# Altium PCB PCB1.PcbDoc (part 1 of 2)
Units mil, origin at the board's own origin, x right, y up, seen from the top; angles counter-clockwise.
Board outline 3937.01 x 3582.68 mil, 2 copper layers (Top Layer, Bottom Layer); 143 components, 102 nets, 475 pads, 464 vias.
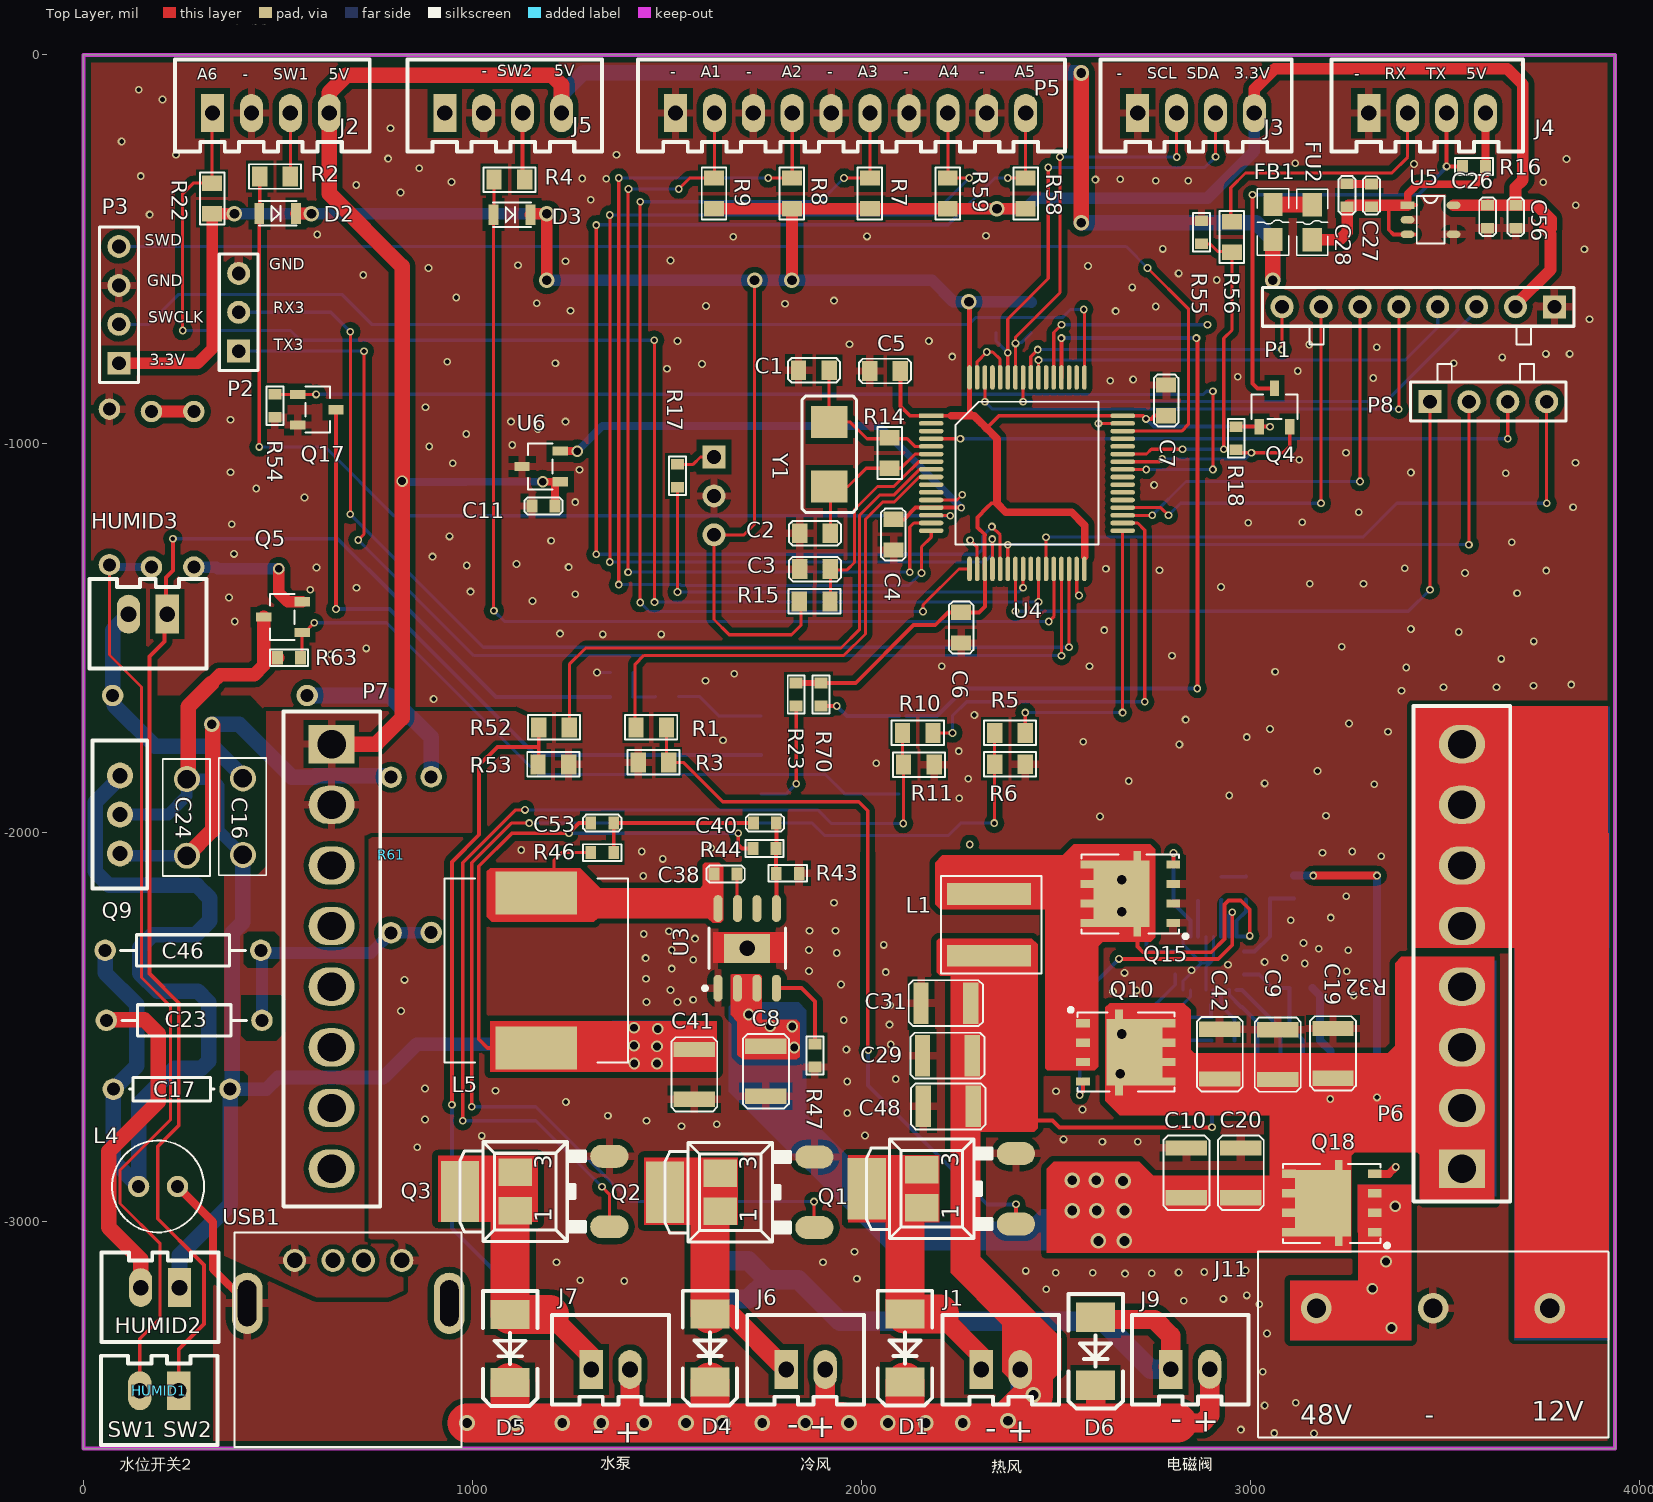
[diagram p0: Top Layer view]
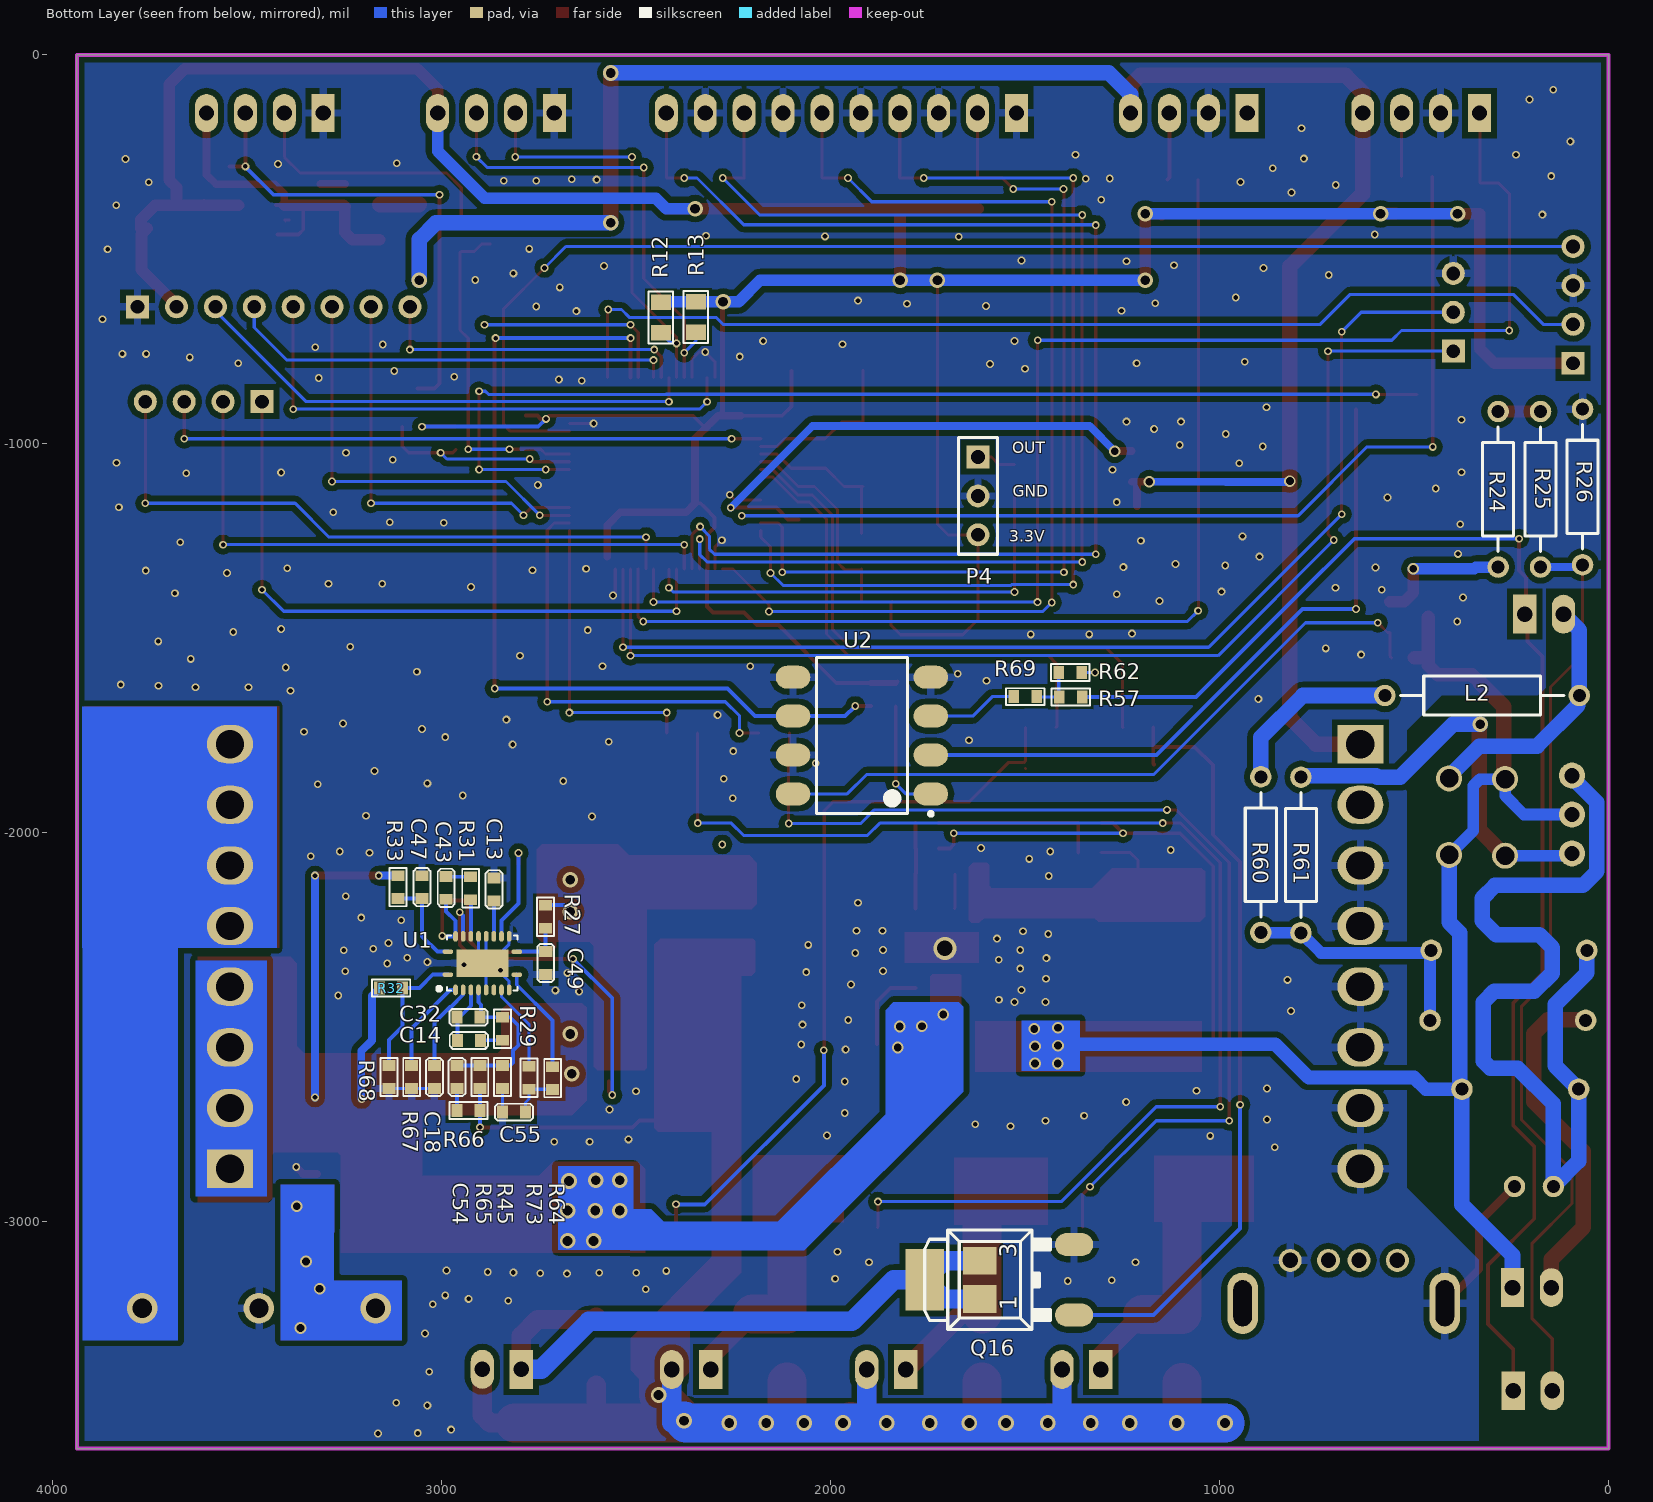
[diagram p1: Bottom Layer view, seen from below]

## Layer stack, top to bottom
Top Layer: signal copper 1.4
Dielectric: dielectric 12.6, FR-4, Dk 4.8
Bottom Layer: signal copper 1.4

## Board outline
0,-3583.01 3937.01,-3583.01 3937.01,-0.33 0,-0.33

## Design rules (kind name [scope] priority, off if disabled: settings)
Clearance Clearance_2 [InNet('+5V')  And InPolygon] p1: gap=12
Clearance Clearance_1 [InPoly And InNet(GND)] p2: gap=15
Clearance [All] p3: gap=5
MinimumSolderMaskSliver [All] p1: minsoldermaskwidth=1
PolygonConnect PolygonConnect_1 [IsVia] p1: connectstyle=Direct reliefconductorwidth=10 reliefentries=4 polygonreliefangle="90 Angle"
PolygonConnect [All] p2: connectstyle=Relief reliefconductorwidth=20 reliefentries=4 polygonreliefangle="90 Angle"
RoutingVias [All] p1: holewidth=28 width=50 viastyle="Through Hole" minholewidth=28 minwidth=50 maxholewidth=28 maxwidth=50
SilkToSilkClearance [All] p1: silktosilkclearance=1
SilkscreenOverComponentPads [All] p1: minsilkscreentomaskgap=1
SolderMaskExpansion [All] p1: expansion=4
Width [All] p1: maxlimit=200 minlimit=6 preferedwidth=10
25 further rules are at their usual default settings.

## Classes and differential pairs
component class Humidifier: C8 C10 C16 C17 C20 C23 C24 C38 C40 C41 C46 C53 HUMID1 HUMID2 HUMID3 L2 L4 L5 Q5 Q9 Q17 Q18 R23 R24 R25 R26 R43 R44 R46 R47 R54 R57 R60 R61 R62 R63 R69 R70 U2 U3
component class cpu: C1 C2 C3 C4 C5 C6 C7 C11 P1 P2 P3 P4 P8 R12 R13 R14 R15 R17 R55 R56 U4 U6 Y1
component class Connector: D1 D2 D3 D4 D5 D6 J1 J2 J3 J4 J5 J6 J7 J9 P5 Q1 Q2 Q3 Q4 Q16 R1 R2 R3 R4 R5 R6 R7 R8 R9 R10 R11 R16 R18 R22 R52 R53 R58 R59
component class POWER: C9 C13 C14 C18 C19 C25 C26 C27 C28 C29 C31 C32 C42 C43 C47 C48 C49 C54 C55 C56 FB1 FU2 J11 L1 P6 P7 Q10 Q15 R27 R28 R29 R31 R32 R33 R45 R64 R65 R66 R67 R68 R73 U1 U5 USB1

## Components (designator, comment, footprint, x,y, rotation, side; value= is the part's Value field where it differs from the comment)
C1 "22pF" 0805c 1838,-811 r0 top
C2 "22pF" 0805c 1841,-1230 r0 top
C3 "100nF" 0805c 1841,-1322 r0 top
C4 "100nF" 0805c 2082,-1273 r90 top
C5 "100nF" 0805c 2021,-813 r0 top
C6 "100nF" 0805c 2256,-1512 r90 top
C7 "100nF" 0805c 2783,-849 r270 top
C8 "GRM32ER72A225KA35L" 1210C 1754,-2549 r270 top
C9 "GRM32ER72A225KA35L" 1210C 3069.77,-2634 r90 top
C10 "GRM32ER72A225KA35L" 1210C 2834.77,-2938 r90 top
C11 "0.1uF" 0603C#1 1212,-1160 r180 top
C13 "EMK107BB7225MA-T" 0603C#2 2864.77,-2175 r90 top
C14 "18nF/16V" 0603C#2 2958.77,-2534 r180 top
C16 "10nF/630V" CAP_5MM 409.77,-1860 r270 top
C17 "1.5nF/630V" AXIAL-0.3 226.77,-2659 r0 top
C18 "18nF/16V" 0603C#2 3018.02,-2597.94 r270 top
C19 "GRM32ER72A225KA35L" 1210C 3211.77,-2631 r90 top
C20 "GRM32ER72A225KA35L" 1210C 2974.77,-2938 r90 top
C23 "47nF/630V" AXIAL-0.4 258.77,-2482 r180 top
C24 "100p/1000v" CAP_5MM 265.77,-1862 r270 top
C26 "10uF/10V" 0603C#1 3609.38,-446 r90 top
C27 "10uF/10V" 0603C#1 3310.61,-332 r270 top
C28 "0.1uF/10V" 0603C#1 3247.61,-391 r90 top
C29 "GRM32ER71A476KE15L" 1210C 2284.77,-2573 r180 top
C31 "GRM32ER71A476KE15L" 1210C 2280.77,-2438 r180 top
C32 "1pF/16V" 0603C#2 2959.77,-2474 r180 top
C38 "2.2nF/50V" 0603C#1 1680,-2106 r180 top
C40 "56pF/50V" 0603C#1 1722,-1975 r0 top
C41 "GRM32ER71A476KE15L" 1210C 1570,-2557 r270 top
C42 "GRM32ER72A225KA35L" 1210C 2920.77,-2633 r90 top
C43 "0.1uF/25V" 0603C#2 2987.77,-2112 r270 top
C46 "47nF/630V" AXIAL-0.4 255.77,-2302 r180 top
C47 "C1608X7S2A104K080AB" 0603C#2 3049.77,-2110 r270 top
C48 "GRM32ER71A476KE15L" 1210C 2286.77,-2703 r180 top
C49 "6.8pF/100V" 0603C#2 2731.77,-2364 r90 top
C53 "3.3nF/16V" 0603C#1 1363,-1975 r180 top
C54 "470pF/16V" 0603C#2 2959.65,-2597.94 r270 top
C55 "2.2uF/16V" 0603C#2 2784,-2718 r0 top
C56 "0.1uF/10V" 0603C#1 3681.61,-386.94 r270 top
D1 "1N4004" D7227 2111.74,-3237 r270 top
D2 "1N4148" sod323 451.77,-408 r0 top
D3 "1N4148" sod323 1054,-411 r0 top
D4 "1N4004" D7227 1610.26,-3237 r270 top
D5 "1N4004" D7227 1096.77,-3238 r270 top
D6 "1N4004" D7227 2601.77,-3245 r270 top
FB1 "100R1A" F0805 3057.61,-475 r90 top
FU2 "500mA/6V" F0805 3158.61,-386 r270 top
HUMID1 "Header 2" SIP-2L 194.77,-3434 r180 top
HUMID2 "Header 2" SIP-2L 196.77,-3169 r180 top
HUMID3 "" SIP-2L 165.77,-1438 r180 top
J1 "OUT-A" SIP-2L 2357.77,-3379.5 r0 top
J2 "IIC" SIP-4L 331.77,-150 r0 top
J3 "IIC" SIP-4L 2709.77,-150 r0 top
J4 "USRT" SIP-4L 3303.77,-150 r0 top
J5 "IIC" SIP-4L 928.77,-150 r0 top
J6 "OUT-B" SIP-2L 1856.27,-3379.5 r0 top
J7 "OUT-C" SIP-2L 1354.77,-3379.5 r0 top
J9 "OUT-C" SIP-2L 2844.77,-3379 r0 top
J11 "Header 3" MG7.62 3169,-3222 r0 top
L1 "XAL6060-682MEB" XAL6060 2327.77,-2157 r270 top
L2 "100uH" AXIAL-0.5 325,-1647 r180 bottom
L4 "47uH" 6*8 191.77,-2909 r180 top
L5 "SRR1210-560M" SRR1210 1164,-2155 r270 top
P1 "Header 8" HDR1X8 3781,-648 r180 top
P2 "Header 3" HDR1X3 399,-762 r90 top
P3 "Header 4" HDR1X4 91,-793 r90 top
P4 "Header 3" HDR1X3 1620.77,-1034 r270 bottom
P5 "Header 10" SIP-10L 1521.77,-150 r0 top
P6 "Header 8" CH3.96-8P 3543.31,-2863.33 r90 top locked
P7 "Header 8" CH3.96-8P 637.8,-1771.98 r270 top locked
P8 "Header 4" HDR1X4 3461,-891.76 r0 top
Q1 "NCE4060K" TO-252-3S#1 2150.77,-2915 r90 top
Q2 "NCE4060K" TO-252-3S#1 1632.77,-2924 r90 top
Q3 "NCE4060K" TO-252-3S#1 1105.77,-2922 r90 top
Q4 "HY0320" SOT23-3 3022,-956 r270 top
Q5 "si2306" SOT23-3 562,-1485 r0 top
Q9 "BU406" to220 93.77,-2053 r90 top
Q10 "BSC117N08NS5ATMA1" "PowerPAK SO-8" 2531.77,-2463 r0 top
Q15 "BSC037N08NS5ATMA1" "PowerPAK SO-8" 2838.77,-2258 r180 top
Q16 "NCE4060K" TO-252-3S#2 1619.77,-3149 r90 top
Q17 "S8050" SOT23-3 550.77,-873 r180 top
Q18 "SI7489DP" "PowerPAK SO-8" 3356.77,-3053 r180 top
R1 "22R" 0805R 1420,-1729 r0 top
R2 "10K" 0805R 531.77,-313 r180 top
R3 "470K" 0805R 1426,-1819 r0 top
R4 "10K" 0805R 1134,-321 r180 top
R5 "22R" 0805R 2420.77,-1743 r180 top
R6 "470k" 0805R 2420.77,-1823.74 r180 top
R7 "10K" 0805R 2021.27,-317 r270 top
R8 "10K" 0805R 1821.02,-317 r270 top
R9 "10K" 0805R 1620.77,-317 r270 top
R10 "22R" 0805R 2183.77,-1743 r180 top
R11 "470k" 0805R 2186.77,-1824.74 r180 top
R12 "2K" 0805R 2436,-636 r270 bottom
R13 "2K" 0805R 2346,-635 r270 bottom
R14 "1MR" 0805R 2072,-1063 r90 top
R15 "10K" 0805R 1840,-1405 r0 top
R16 "10K" 0603R#1 3603.77,-287 r180 top
R17 "100" 0603R#1 1526.77,-1112 r90 top
R18 "10K" 0603R#1 2963,-956 r270 top
R22 "10K" 0805R 330.77,-330 r270 top
R23 "100" 0603R#1 1832,-1673.99 r90 top
R24 "0" AXIAL-0.4 283.77,-1117 r270 bottom
R25 "1.2K" AXIAL-0.4 174.77,-1117 r270 bottom
R26 "4.7K" AXIAL-0.4 66.77,-1111 r270 bottom
R27 "1.65K" 0603R#2 2732.77,-2186 r270 top
R29 "2.37K" 0603R#2 2842.77,-2474 r270 top
R31 "0" 0603R#2 2924.77,-2113 r270 top
R32 "121K/1%" 0603R#1 3099.77,-2399 r0 bottom
R33 "2.2" 0603R#2 3111.77,-2110 r270 top
R43 "6.37K" 0603R#1 1781,-2104 r0 top
R44 "121K" 0603R#1 1721,-2040 r0 top
R45 "1.27K" 0603R#2 2842.9,-2597.94 r270 top
R46 "453K" 0603R#1 1363,-2051 r180 top
R47 "100K" 0603R#1 1880,-2602 r90 top
R52 "22R" 0805R 1249,-1729 r180 top
R53 "470k" 0805R 1247,-1824 r180 top
R54 "4.7K" 0603r#1 492,-932 r90 top
R55 "20K" 0603R#1 2874,-427 r270 top
R56 "10K" 0805R 2952,-429 r270 top
R57 "100k" 0603r#2 1412,-1651 r180 top
R58 "10K" 0805R 2421.77,-317 r270 top
R59 "10K" 0805R 2221.52,-395.74 r90 top
R60 "10" AXIAL-0.4 893.77,-2056 r90 bottom
R61 "2.2" AXIAL-0.4 790.77,-2057 r90 top
R62 "20K" 0603r#2 1354,-1588 r0 top
R63 "10K" 0603R#1 558,-1550 r180 top
R64 "20K" 0603R#2 2714,-2601 r270 top
R65 "18K" 0603R#2 2901.27,-2657 r90 top
R66 "19.1" 0603R#2 2900.77,-2714 r0 top
R67 "28.7K" 0603R#2 3076.4,-2657 r90 top
R68 "8.06K" 0603R#2 3134.77,-2657 r90 top
R69 "1K" 0603R#2 1529,-1650 r180 top
R70 "100" 0603R#1 1896,-1673.99 r90 top
R73 "20K" 0603R#2 2775,-2600 r270 top
U1 "LM5145" QFN050P600-8N 2894.77,-2335 r90 top
U2 "TLP521-2" TLP521-2GB 1919,-1750 r0 bottom
U3 "LM5164DDAR" SOP127P600X168_HS-8N 1706,-2297 r90 top
U4 "STM32F103R8T6" LQFP-64 2179,-928 r0 top
U5 "TLV70233DBVR" SOT23-5(DBV) 3403.38,-387 r0 top
U6 "REF2933AIDBZT" SOT23-3 1225.68,-1097.65 r0 top
USB1 "Header 5" USB-A 542.77,-3099 r0 top
Y1 "8MHz" SMT5032 1917,-1027 r90 top

## Footprints (in the part's own frame and the unit in brackets; to place one, negate y for a bottom-side part, rotate by r counter-clockwise, add the part's x,y. Pads: shape width x height; smd on the part's side, far side on the other; paste and mask are expansions set on the pad)
6*8 [mil]
  round 55 hole 33: 1(50,0) 2(-50,0)
  silkscreen extent -118,-118 118,118
0603C#1 [mm]
  rect 0.7x0.85 smd: 1(0,0) 2(1.5,0)
  silkscreen extent -0.5,-0.55 2,0.55
0603C#2 [mm]
  rect 0.7x0.85 smd far side: 1(0,0) 2(1.5,0)
0603R#1 [mm]
  rect 0.7x0.85 smd: 1(0,0) 2(1.5,0)
  silkscreen extent -0.5,-0.55 2,0.55
0603R#2 [mm]
  rect 0.7x0.85 smd far side: 1(0,0) 2(1.5,0)
0603r#1 [mm]
  rect 0.7x0.85 smd: 1(0,0) 2(1.5,0)
  silkscreen extent -0.5,-0.55 2,0.55
0603r#2 [mm]
  rect 0.7x0.85 smd far side: 1(0,0) 2(1.5,0)
0805c [mm]
  rect 1x1.3 smd: 1(0,0) 2(2,0)
  silkscreen extent -0.7,-0.8 2.7,0.8
0805R [mm]
  rect 1x1.3 smd: 1(0,0) 2(2,0)
  silkscreen extent -0.7,-0.8 2.7,0.8
1210C [mm]
  rect 1x2.7 smd: 1(0,0) 2(3.25,0)
  silkscreen extent -0.8,-1.5 4.05,1.5
AXIAL-0.3 [mm] "Axial Device, Thru-Hole; 2 Leads; 0.3 in Pin Spacing"
  round 1.4 hole 0.85: 1(-3.81,0) 2(3.81,0)
  silkscreen extent -2.77,-0.76 2.77,0.76
AXIAL-0.4 [mm] "Axial Device, Thru-Hole; 2 Leads; 0.4 in Pin Spacing"
  round 1.4 hole 0.85: 1(-5.08,0) 2(5.08,0)
  silkscreen extent -4.06,-1.02 4.06,1.02
AXIAL-0.5 [mm] "Axial Device, Thru-Hole; 2 Leads; 0.5 in Pin Spacing"
  round 1.4 hole 0.85: 1(-6.35,0) 2(6.35,0)
  silkscreen extent -5.33,-1.27 5.33,1.27
CAP_5MM [mm]
  round 1.7 hole 1.2: 1(0,0) 2(5,0)
  silkscreen extent -1.32,-1.57 6.32,1.52
CH3.96-8P [mm]
  rect 2.5x3 hole 1.85: 1(0,0)
  oval 2.5x3 hole 1.85: 2(3.96,0) 3(7.92,0) 4(11.88,0) 5(15.84,0) 6(19.8,0) 7(23.76,0) 8(27.72,0)
  silkscreen extent -2.14,-3.15 30.2,3.18
D7227 [mil]
  rect 75x100 smd: A(0,0) K(175,0)
  silkscreen extent -60,-70 235,70, body extent -22,-57 194,53, height 88
F0805 [mil]
  rect 60x50 smd: 1(0,0) 2(90,0)
  silkscreen extent -40,-40 130,40, body extent 4,-23 82,24, height 20
HDR1X3 [mm] "Connector; Header; 3 Position"
  rect 1.5x1.5 hole 0.9: 1(0,0)
  round 1.5 hole 0.9: 2(2.54,0) 3(5.08,0)
  silkscreen extent -1.27,-1.27 6.35,1.27
HDR1X4 [mm] "Connector; Header; 4 Position"
  rect 1.5x1.5 hole 0.9: 1(0,0)
  round 1.5 hole 0.9: 2(2.54,0) 3(5.08,0) 4(7.62,0)
  silkscreen extent -1.27,-1.27 8.89,1.27
HDR1X8 [mm] "Connector; Header; 8 Position"
  rect 1.5x1.5 hole 0.9: 1(0,0)
  round 1.5 hole 0.9: 2(2.54,0) 3(5.08,0) 4(7.62,0) 5(10.16,0) 6(12.7,0) 7(15.24,0) 8(17.78,0)
  silkscreen extent -1.27,-1.27 19.05,1.27
LQFP-64 [mm]
  rect 1.6x0.3 smd: 1(0,0)
  oval 1.6x0.3 smd: 2(0,-0.5) 3(0,-1) 4(0,-1.5) 5(0,-2) 6(0,-2.5) 7(0,-3) 8(0,-3.5) 9(0,-4) 10(0,-4.5) 11(0,-5) 12(0,-5.5) 13(0,-6) 14(0,-6.5) 15(0,-7) 16(0,-7.5) 33(12.5,-7.5) 34(12.5,-7) 35(12.5,-6.5) 36(12.5,-6) 37(12.5,-5.5) 38(12.5,-5) 39(12.5,-4.5) 40(12.5,-4) 41(12.5,-3.5) 42(12.5,-3) 43(12.5,-2.5) 44(12.5,-2) 45(12.5,-1.5) 46(12.5,-1) 47(12.5,-0.5) 48(12.5,0)
  oval 0.3x1.6 smd: 17(2.5,-10) 18(3,-10) 19(3.5,-10) 20(4,-10) 21(4.5,-10) 22(5,-10) 23(5.5,-10) 24(6,-10) 25(6.5,-10) 26(7,-10) 27(7.5,-10) 28(8,-10) 29(8.5,-10) 30(9,-10) 31(9.5,-10) 32(10,-10) 49(10,2.5) 50(9.5,2.5) 51(9,2.5) 52(8.5,2.5) 53(8,2.5) 54(7.5,2.5) 55(7,2.5) 56(6.5,2.5) 57(6,2.5) 58(5.5,2.5) 59(5,2.5) 60(4.5,2.5) 61(4,2.5) 62(3.5,2.5) 63(3,2.5) 64(2.5,2.5)
  silkscreen extent 1.59,-8.41 10.91,0.91
MG7.62 [mm]
  round 2 hole 1.25: 1(0,0) 2(7.62,0) 3(15.24,0)
  silkscreen extent -3.81,-8.44 19.08,3.7
"PowerPAK SO-8" [mm]
  rect 0.9x0.54 smd: 1(0.95,-0.67) 2(0.95,-1.94) 3(0.95,-3.21) 4(0.95,-4.48) 5(6.548,-4.48) 6(6.548,-3.21) 7(6.548,-1.94) 8(6.548,-0.67)
  rect 0.5x1.6 smd: 5(3.3,-4.575) 8(3.3,-0.575)
  rect 3.66x2.5 smd: 5(4.325,-3.495)
  rect 3.66x2 smd: 8(4.325,-1.401)
  silkscreen extent 0.03,-5.12 6.93,0.33
QFN050P600-8N [mm]
  oval 0.3x0.7 smd far side: 1(-0.75,-2.25) 10(-0.75,2.25) 11(0.75,2.25) 20(0.75,-2.25)
  oval 0.7x0.3 smd far side: 2(-1.75,-1.75) 3(-1.75,-1.25) 4(-1.75,-0.75) 5(-1.75,-0.25) 6(-1.75,0.25) 7(-1.75,0.75) 8(-1.75,1.25) 9(-1.75,1.75) 12(1.75,1.75) 13(1.75,1.25) 14(1.75,0.75) 15(1.75,0.25) 16(1.75,-0.25) 17(1.75,-0.75) 18(1.75,-1.25) 19(1.75,-1.75)
  rect 1.8x3.4 smd far side: 21(0,0)
  body extent -1.8,-2.3 1.8,2.3, height 0.8
SIP-2L [mil]
  rect 60x100 hole 40: 1(-50,0)
  oval 60x100 hole 40: 2(50,0)
  silkscreen extent -150,-90 150,140
SIP-4L [mm]
  rect 1.5x2.5 hole 1: 1(0,0)
  oval 1.5x2.5 hole 1: 2(2.54,0) 3(5.08,0) 4(7.62,0)
  silkscreen extent -2.44,-2.5 10.26,3.5
SIP-10L [mm]
  rect 1.5x2.5 hole 1: 1(0,0)
  oval 1.5x2.5 hole 1: 2(2.54,0) 3(5.08,0) 4(7.62,0) 5(10.16,0) 6(12.7,0) 7(15.24,0) 8(17.78,0) 9(20.32,0) 10(22.86,0)
  silkscreen extent -2.44,-2.5 25.43,3.5
SMT5032 [mm]
  rect 2.1x2.4 smd: 1(-2.1,0) 2(2.1,0)
  silkscreen extent -3.81,-1.78 3.81,1.78
sod323 [mm]
  rect 0.65x1.35 smd: A(0,0) K(2.4,0)
  silkscreen extent -0.03,-0.8 2.44,0.8
SOP127P600X168_HS-8N [mm] "SOP, 8-Leads, Body 5.0x4.0mm (max), Pitch 1.27mm, IPC Medium Density"
  oval 1.75x0.6 smd: 1(-2.6,1.905) 2(-2.6,0.635) 3(-2.6,-0.635) 4(-2.6,-1.905) 5(2.6,-1.905) 6(2.6,-0.635) 7(2.6,0.635) 8(2.6,1.905)
  rect 1.9x3 smd: 9(0,0)
  silkscreen extent -2.72,-2.5 1.33,2.88, body extent -2,-2.5 2,2.5, height 1.68
SOT23-3 [mm]
  rect 1x0.6 smd: 1(0,0) 2(0,2) 3(-2.5,1)
  silkscreen extent -2.1,-0.5 -0.5,2.5
SOT23-5(DBV) [mm]
  rect 0.9x0.5 smd: 1(0,0)
  oval 0.9x0.5 smd: 2(0,-0.95) 3(0,-1.9) 4(3,-1.9) 5(3,0)
  silkscreen extent 0.6,-2.5 2.4,0.6
SRR1210 [mm]
  rect 2.8x5.3 smd: 1(0,0) 2(10.1,0)
  silkscreen extent -0.95,-6 11.05,6
TLP521-2GB [mm] "SOP, 8-Leads, Body 10.2x7.0mm (max), Pitch 2.54mm, IPC Medium Density"
  oval 2.25x1.5 smd: 1(-4.5,3.81) 2(-4.5,1.27) 3(-4.5,-1.27) 4(-4.5,-3.81) 5(4.5,-3.81) 6(4.5,-1.27) 7(4.5,1.27) 8(4.5,3.81)
  silkscreen extent -4.62,-5.1 2.97,5.23
to220 [mm]
  round 1.7 hole 1: 1(0,0) 2(2.54,0) 3(5.08,0)
  silkscreen extent -2.29,-1.78 7.37,1.78
TO-252-3S#1 [mm]
  oval 1.5x2.5 smd: 1(-2.3,-6.25) 3(2.3,-6.25)
  rect 1.8x2.2 smd: 2(-1.25,-0.1) 2(1.25,-0.1)
  rect 4x2.5 smd: 2(0,3.5)
  silkscreen extent -3.25,-4.7 3.25,3.5
TO-252-3S#2 [mm]
  oval 1.5x2.5 smd far side: 1(-2.3,6.25) 3(2.3,6.25)
  rect 1.8x2.2 smd far side: 2(-1.25,0.1) 2(1.25,0.1)
  rect 4x2.5 smd far side: 2(0,-3.5)
USB-A [mm]
  round 1.5 hole 1: 1(0,0) 2(2.5,0) 3(4.5,0) 4(7,0)
  oval 2x4 hole 1.2 slot 3 at 90 deg: 5(-3.1,-2.8) 6(10.1,-2.8)
  silkscreen extent -3.91,-12.17 10.89,1.83
XAL6060 [mm]
  rect 1.43x5.5 smd: 1(0,0) 2(4.04,0)
  silkscreen extent -1.17,-3.15 5.19,3.41

## Part data
C1 C2 C3 C4 C5 C6 C7 C11: library part CAP, "Capacitor"
C8 C9 C10 C13 C14 C18 C19 C20 C29 C31 C32 C38 C40 C41 C42 C43 C47 C48 C49 C53 C54 C55: library part 0.01UF, "CCX85-103"
C16 C17 C23 C24 C26 C27 C28 C46 C56: library part Cap, "Capacitor"
D1 D4 D5 D6: library part Diode_2, "Default Diode"
D2 D3: library part Diode, "Default Diode"
FB1 FU2: library part FUSE2, "Fuse"
HUMID1 HUMID2: "Header, 2-Pin"
HUMID3: library part "Header 2", "Header, 2-Pin"
J1 J6 J7 J9: library part CON2, "Connector"
J2 J3 J4 J5: library part SIP4-2.54, "CN-SIP4-2.54"
J11 P2 P4: "Header, 3-Pin"
L1 L5: library part INDUCTOR
L2 L4: library part Inductor, "Inductor"
P1 P6 P7: "Header, 8-Pin"
P3 P8: "Header, 4-Pin"
P5: "Header, 10-Pin"
Q1 Q2 Q3 Q16: "NMOSFET"
Q4 Q5: library part BUK92150-55A, "BUK92150-55A"
Q9: library part NPN, "NPN Bipolar Transistor"
Q10 Q15 Q18: library part Si4004DY, "Si4004DY"
Q17: library part NPN
R1 R2 R3 R4 R5 R6 R7 R8 R9 R10 R11 R22 R52 R53 R58 R59: library part 1K, "CR85-102J"
R12 R13 R14 R15 R17 R27 R29 R31 R43 R44 R45 R46 R55 R56 R65 R66: library part Res3, "Resistor"
R16 R18: library part Res2, "Resistor"
R23 R63 R69 R70: library part R, "R"
R24 R25 R26 R32 R33 R47 R54 R57 R60 R61 R62 R64 R67 R68 R73: library part "Res Semi", "Semiconductor Resistor"
U4: "STM32 ARM-based 32-bit MCU with 64 Kbytes Flash, 64-pin LQFP, Industrial Temperature"
U5: library part TLV70230DBVR
U6: library part REF3012
USB1: "Header, 5-Pin"
Y1: library part XTAL, "Crystal Oscillator"

## Via types
v1: diameter 20, hole 12, Top Layer to Bottom Layer, tented both sides, 399 vias
v2: diameter 40, hole 25, Top Layer to Bottom Layer, tented both sides, 46 vias
v3: diameter 30, hole 20, Top Layer to Bottom Layer, tented both sides, 18 vias
v4: diameter 59.06, hole 39.37, Top Layer to Bottom Layer, 1 vias

## Nets (pads, with @x,y where several pads share a name; then routed paths per layer and width w, separated by ;. In a path a pad name is that pad's centre, name@x,y a point inside that pad or via, vN(x,y) a via of type N, cw(c..) or ccw(c..) an arc to the next point about the centre after c; other vN are vias at no path point)
+5V: C11.1 FB1.1 J2.4 J5.4 P7.1 P7.2 U6.1 USB1.1 | length 5588.5
  Top Layer w20: v3@1180,-1098 v3(1180.35,-1097.65) U6.1@1225.68,-1097.65 ; C11.1@1212,-1160 U6.1@1212,-1097.65
  Top Layer w30: J2.4@631.77,-150 J2.4@635.77,-146 ; P7.1@637.8,-1771.98 P7.1@643.81,-1778
  Top Layer w40: P7.1@637.8,-1771.98 752.02,-1771.98 819,-1705 819,-544 631.77,-356.77 J2.4@631.77,-150 631.77,-97.23 676,-53 1204,-53 1228.77,-77.77 J5.4@1228.77,-150 ; v2(2565,-432) v2(2565,-47) ; FB1.1@3056.61,-475 3056.61,-579.61 v2(3057,-580)
  Bottom Layer w20: v3@819,-1098 984,-1098 984.35,-1097.65 v3(1180.35,-1097.65)
  Bottom Layer w40: J5.4@1228.77,-150 1228.77,-102.23 1285,-46 2564,-46 v2(2565,-47) ; v2(2565,-432) 3013.88,-432 3056.61,-474.72 3056.61,-579.61 v2(3057,-580)
  other v2: 3057,-580 2565,-432 2565,-47
  other v3: 819,-1096
+12V: C29.1 C31.1 C48.1 D1.K D4.K D5.K D6.K J1.2 J6.2 J7.2 J9.2 L1.2 R65.1 R66.1 | length 5378.9
  Top Layer w10: 2398,-2744 2403,-2739 2491,-2739 2509,-2757 2793,-2757 v1(2900.77,-2757)
  Top Layer w50: 1404.77,-3517 J7.2@1404.77,-3379.5 ; 1906.27,-3517 J6.2@1906.27,-3379.5 ; D6.K@2601.77,-3420 2601.77,-3508 2610.77,-3517 ; 2811.77,-3517 2874.89,-3517 2894.77,-3497.12 J9.2@2894.77,-3379
  Top Layer w100: v2(985.77,-3517) 1088.77,-3517 ; D5.K@1096.77,-3413 1096.77,-3509 1088.77,-3517 ; v2@1439.77,-3515 v2@1437.77,-3517 ; D4.K@1610.26,-3412 1610.26,-3509.51 1602.77,-3517 ; 1946.77,-3513 1942.77,-3517 ; 2111.74,-3514.03 D1.K@2111.74,-3412 ; 2441.77,-3323 v2(2441.77,-3445) v2@2369.77,-3517 ; 2811.77,-3517 2610.77,-3517 v2@2369.77,-3517 ; 1088.77,-3517 v2(1109.77,-3517) v2(1230.77,-3517) v2(1330.77,-3517) 1404.77,-3517 v2@1437.77,-3517 ; v2@1437.77,-3517 v2(1441.77,-3517) v2(1548.77,-3517) 1602.77,-3517 ; 1602.77,-3517 v2(1642.77,-3517) v2(1744.77,-3517) v2(1855.77,-3517) 1906.27,-3517 1942.77,-3517 ; 1942.77,-3517 v2(1967.77,-3517) v2(2067.77,-3517) v2(2164.77,-3517) v2(2259.77,-3517) v2@2369.77,-3517
  Bottom Layer w10: v1(2900.77,-2757) R66.1@2900.77,-2714 2900.77,-2657.5 R65.1@2901.27,-2657
  Bottom Layer w50: 1404.77,-3517 J7.2@1404.77,-3379.5 ; 1906.27,-3517 J6.2@1906.27,-3379.5 ; 2407.77,-3517 J1.2@2407.77,-3379.5
  Bottom Layer w100: v2(985.77,-3517) v2(1109.77,-3517) v2(1230.77,-3517) v2(1330.77,-3517) 1404.77,-3517 v2(1441.77,-3517) v2(1548.77,-3517) v2(1642.77,-3517) v2(1744.77,-3517) v2(1855.77,-3517) 1906.27,-3517 v2(1967.77,-3517) v2(2067.77,-3517) v2(2164.77,-3517) v2(2259.77,-3517) 2370.77,-3517 v2(2376.46,-3511.31)
+48V: J11.1 Q18.1 Q18.2 Q18.3
  other v3: 3362,-3273 3313,-3172 3348,-3102 3372,-2960
A1: P5.2 R9.1 U4.15 | length 2283.5
  Top Layer w8: v1(1400,-1330) 1400,-346 v1(1401,-345) ; v1(1530,-345) 1558,-317 R9.1@1620.77,-317 1621.77,-316 P5.2@1621.77,-150 ; v1(2124,-1330) 2124,-1214 2134.41,-1203.59 U4.15@2179,-1203.59
  Bottom Layer w8: v1(1400,-1330) v1(2124,-1330) ; v1(1401,-345) v1(1530,-345)
  other v1: 2124,-1330
A2: P5.4 R8.1 U4.16 | length 2568.5
  Top Layer w8: v1(1376,-1362) v1(1376,-317) ; v1(1760,-317) R8.1@1821.02,-317 1821.77,-316.25 P5.4@1821.77,-150 ; v1(2154,-1332) 2154,-1265 2179,-1240 U4.16@2179,-1223.28
  Bottom Layer w8: v1(1376,-1362) 1534.64,-1362 1536.64,-1364 2122,-1364 v1(2154,-1332) ; v1(1376,-317) v1(1760,-317)
  other v1: 2154,-1332
A3: P5.6 R7.1 U4.17 | length 2723.9
  Top Layer w8: v1(1431,-1408) v1(1431,-378) ; v1(1955,-317) R7.1@2021.27,-317 2021.77,-316.5 P5.6@2021.77,-150 ; v1(2158,-1431) 2158,-1414 2250.3,-1321.7 2252,-1321.7 U4.17@2277.43,-1321.7
  Bottom Layer w8: v1(1431,-1408) 1454,-1431 v1(2158,-1431) ; v1(1431,-378) 1894,-378 v1(1955,-317)
  other v1: 2158,-1431
A4: P5.8 R59.2 U4.20 | length 3185.7
  Top Layer w8: v1(1353,-1304) v1(1353,-412) ; P5.8@2221.77,-150 2221.77,-316.75 R59.2@2221.52,-317 v1(2277,-317) ; v1(2336,-1245) 2336.48,-1245.48 U4.20@2336.48,-1321.7
  Bottom Layer w8: v1(1353,-1304) 2317,-1304 2336,-1285 v1(2336,-1245) ; v1(1353,-412) 2182,-412 v1(2277,-317)
A5: P5.10 R58.1 U4.21 | length 3352.3
  Top Layer w8: v1(1318,-1284) 1318,-437 v1(1318,-438) ; v1(2335,-1213) 2356.17,-1234.17 U4.21@2356.17,-1321.7 ; v1(2376,-317) R58.1@2421.77,-317 P5.10@2421.77,-150
  Bottom Layer w8: v1(1318,-1284) 2298,-1284 2311.08,-1270.92 2311.08,-1236.92 v1(2335,-1213) ; v1@1318,-437 1341,-437 2223,-437 2343,-317 v1(2376,-317)
A6: J2.1 R22.1 U4.26 | length 3588.5
  Top Layer w8: v1(255,-709) 255,-357 282,-330 R22.1@330.77,-330 330.77,-151 J2.1@331.77,-150 ; v1(1467.77,-1407) 1467.77,-734.23 v1@1468,-734 ; U4.26@2454.59,-1321.7 v1(2454.59,-1406.59) v1@2455,-1407
  Bottom Layer w8: v1(255,-709) 310,-709 532,-709 557,-734 v1(1467,-734) v1@1468,-734 ; v1(1467.77,-1407) v1@2455,-1407
BLK: P1.7 U4.36 | length 1030.8
  Top Layer w8: U4.36@2671.13,-1164.22 2769.31,-1164.22 v1(2789,-1183.91) ; v1(3181,-1152.95) P1.7@3181,-648
  Bottom Layer w8: v1(2789,-1183.91) 2819.95,-1152.95 v1@3176,-1152.95
CTR_OUT1: R1.1 U4.9 | length 1296.5
  Top Layer w8: R1.1@1420,-1729 1418,-1727 1418,-1566.35 1440.35,-1544 1955,-1544 2010,-1489 2010,-1194 2054,-1150 2083.38,-1150 2147.9,-1085.48 U4.9@2179,-1085.48
CTR_OUT2: R5.1 U4.33 | length 772.4
  Top Layer w8: v1@2420.77,-1691.23 R5.1@2420.77,-1743 R5.1@2422.77,-1741 ; v1(2671,-1691) 2671.13,-1690.87 U4.33@2671.13,-1223.28
  Bottom Layer w8: v1(2421,-1691) v1(2671,-1691)
  other v1: 2421,-1691 2671,-1691
CTR_OUT3: R10.1 U4.34 | length 1108.8
  Top Layer w8: R10.1@2183.77,-1743 2233.54,-1743 v1(2233.77,-1743.23) ; U4.34@2671.13,-1203.59 2709.59,-1203.59 2728,-1222 v1(2728,-1663)
  Bottom Layer w8: v1(2233.77,-1743.23) 2233.77,-1699.23 2270,-1663 v1(2728,-1663)
CTR_OUT4: R52.1 U4.8 | length 1472.2
  Top Layer w8: R52.1@1248.77,-1728.77 R52.1@1249,-1729 1249,-1567 1291,-1525 1947,-1525 1995,-1477 1995,-1183 2046,-1132 2083,-1132 2149.2,-1065.8 U4.8@2179,-1065.8
DC: P1.6 U4.35 | length 1170.9
  Top Layer w8: U4.35@2671.13,-1183.91 v1(2746.91,-1183.91) ; v1(3281,-1097) 3281,-957 ; 3281,-1033 3281,-957 ; P1.6@3281,-648 3281,-957
  Bottom Layer w8: v1(2746.91,-1183.91) 2833.81,-1097 3212,-1097 v1(3281,-1097)
GND: C1.1 C2.1 C3.1 C4.1 C5.1 C6.1 C7.1 C8.2 C9.2 C10.2 C11.2 C13.2 C18.2 C19.2 C20.2 C26.1 C27.1 C28.2 C29.2 C31.2 C41.2 C42.2 C47.1 C48.2 C49.1 C55.2 C56.2 J2.2 J3.1 J4.1 J5.2 J11.2 L4.2 P1.1 P2.3 P3.3 P4.2 P5.1 P5.3 P5.5 P5.7 P5.9 P7.3 P7.4 P7.5 P7.6 P7.7 P7.8 Q1.3 Q2.3 Q3.3 Q15.1 Q15.2 Q15.3 Q16.3 Q17.2 Q18.4 R3.1 R6.1 R11.1 R26.1 R43.2 R45.2 R47.1 R53.1 R54.1 R55.1 R62.1 R67.1 R68.1 U1.6 U1.9 U1.12 U1.15 U1.16 U1.21 U2.4 U2.5 U2.7 U3.1 U3.9 U4.12 U4.18 U4.31 U4.47 U4.60 U4.63 U5.2 U5.4 U6.3 USB1.4 USB1.5 | length 1608.1
  Top Layer w8: U4.12@2179,-1144.54 2245.46,-1144.54 v1(2259,-1131) ; v1(2279,-1248) 2297.11,-1266.11 U4.18@2297.11,-1321.7 ; U4.63@2297.11,-829.57 2297.11,-788.89 v1(2322,-764) 2337,-764 2356.17,-783.17 U4.60@2356.17,-829.57 ; U4.31@2553.02,-1321.7 2553.02,-1384.02 v1(2559,-1390) ; v1@2608.72,-947 2609.41,-947.68 U4.47@2671.13,-947.68 ; U5.2@3390.2,-424.4 U5.2@3403.38,-424.4 U5.2@3400.83,-426.94
  Top Layer w20: L4.2@241.77,-2909 333,-3000.23 333,-3121.51 USB1.5@420.72,-3209.24 ; C28.2@3247.61,-331.94 3310.55,-331.94 C27.1@3310.61,-332 ; Q18.4@3319.37,-2876.62 3355.38,-2876.62 v1(3373,-2859)
  Bottom Layer w8: v1(1320,-1588) R62.1@1354,-1588 ; U1.9@2825.87,-2403.9 2825.87,-2382.1 2825.77,-2382 U1.21@2872.77,-2335 ; U1.12@2825.87,-2266.1 2825.87,-2286.1 2874.77,-2335 U1.21@2894.77,-2335 ; C55.2@2837.83,-2716 2842.9,-2710.93 R45.2@2842.9,-2657 ; U1.6@2884.93,-2403.9 2884.93,-2344.84 U1.21@2894.77,-2335 ; U1.15@2884.93,-2266.1 2884.93,-2325.16 U1.21@2894.77,-2335 ; U1.16@2904.61,-2266.1 2904.61,-2325.16 U1.21@2894.77,-2335 ; C18.2@3018.02,-2657 R67.1@3076.4,-2657 R68.1@3134.77,-2657
  other v1: 3163,-3544 3061,-3543 2975,-3534 3036,-3472 3116,-3465 3031,-3385 3042,-3287 3022,-3212 2828,-3203 2930,-3198 2990,-3189 2475,-3173 1390,-3152 1277,-3150 1988,-3146 2677,-3133 2746,-3132 2499,-3131 2594,-3131 2815,-3130 2881,-3129 2422,-3126 2987,-3125 1216,-3104 1901,-3104 1982,-3077 858,-2808 2619,-2794 2710,-2794 2519,-2788 1024,-2779 2009,-2778 1537,-2754 1628,-2749 1447,-2740 878,-2737 1348,-2727 1963,-2720 2568,-2711 1240,-2692 2500,-2664 1059,-2663 878,-2657 1963,-2639 2088,-2633 1961,-2557 2075,-2544 2072,-2493 1954,-2481 816,-2458 2074,-2443 1447,-2435 1527,-2435 1567,-2429 3265,-2418 2646,-2408 2707,-2405 1509,-2404 1947,-2390 825,-2378 1446,-2375 2676,-2360 2062,-2358 3247,-2356 1865,-2355 2848,-2353 1512,-2349 2942,-2339 3139,-2336 3036,-2332 1567.5,-2326.53 1445,-2322 3088,-2321 1936,-2309 3251,-2302 1512,-2301 1865,-2301 3175,-2298 2057,-2288 3136,-2283 1572,-2272 1440,-2260 1505,-2253 1866,-2252 1933,-2252 3103,-2225 3206,-2218 1929,-2180 3246,-2163 1439,-2111 1489,-2067 3336,-2060 3185,-2051 1435,-2048 3261,-2048 1125,-2044 1613,-2039 2613,-1958 3194,-1956 2251,-1911 2945,-1904 3318,-1875 3036,-1873 2687,-1867 2274,-1861 3172,-1841 2038,-1821 2250,-1790 2817,-1773 2570,-1766 1644,-1762 2990,-1754 3353,-1740 3050,-1733 3253,-1719 2833,-1709 2290,-1697 900,-1656 3388,-1635 3496,-1626 3632,-1626 3727,-1622 3824,-1619 1599,-1609 1673,-1591 3063,-1586 3400,-1575 2206,-1572 2586,-1572 3644,-1553 2798,-1545 636,-1542 727,-1526 3234,-1522 3728,-1508 1335,-1490 1485,-1490 1225,-1488 3535,-1484 2624,-1479 3412,-1476 389,-1457 1154,-1404 374,-1395 1264,-1387 3685,-1384 995,-1380 583,-1375 702,-1370 2924,-1368 3152,-1360 3290,-1360 3551,-1332 3760,-1326 2766,-1325 2628,-1321 3396,-1320 599,-1318 1247,-1317 985,-1313 1113,-1309 897,-1290 387,-1283 3671,-1253 1202,-1249 941,-1238 381,-1207 2994,-1203 3133,-1202 3278,-1176 3829,-1163 1264,-1150 568,-1138 444,-1115 2752,-1106 3656,-1076 3412,-1074 378,-1073 1275,-1067 949,-1050 3835,-1049 3125,-1041 3245,-1023 889,-1007 1102,-1003 984,-975 1168,-962 2608.72,-948 1099,-943 1239,-943 378,-938 879,-906 2639,-838 2698,-835 3315,-831 2967,-828 3121,-813 1500,-807 1590,-795 1213,-793 3522,-793 935,-789 3647,-778 2233,-776 3759,-769 3820,-769 3324,-752 3151,-745 1969,-744 1527,-736 2173,-736 3871,-680 2653,-659 1252,-658 2756,-647 1600,-646 1803,-640 1165,-639 1929,-632 958,-624 2696,-598 2913,-579 719,-566 2815,-562 887,-548 2582,-543 1117,-541 1239,-531 1509,-529 3858,-500 2774,-499 1670,-468 2014,-467 2320,-465.03 601,-462 170,-411 3836,-387 1304,-373 815,-354 701,-335 3752,-328 946,-327 2756,-324 2840,-324 2601,-321 2665,-320 1344,-319 1282,-318 147,-312 863,-292 3420,-281 3115,-279 3812,-268 783,-267 238,-257 1370,-257 98,-223 789,-189 203,-115 142,-90
  other v4: 1706,-2297
HUMID_EN: U4.53 | length 518.9
  Top Layer w8: U4.53@2493.96,-829.57 2493.96,-714.04 v1(2514,-694)
  Bottom Layer w8: v1(2514,-694) v1(2889,-694)
  other v1: 2889,-694
IIC_SCL: J3.2 R12.2 U4.58 | length 1078
  Top Layer w8: U4.58@2395.54,-829.57 2395.54,-725.97 2510,-611.5 v1(2510,-263) ; J3.2@2809.77,-150 2809.77,-262.77 v1(2810,-263)
  Bottom Layer w8: v1@2395.54,-740 2410.74,-740 R12.2@2436,-714.74 ; v1(2510,-263) v1(2810,-263)
  other v1: 2395.54,-742
IIC_SDA: J3.3 R13.2 U4.59 | length 1201
  Top Layer w8: U4.59@2375.85,-829.57 2375.85,-679.15 2480,-575 v1(2480,-290) ; J3.3@2909.77,-150 2909.77,-261.77 v1(2910,-262)
  Bottom Layer w8: R13.2@2346,-713.74 2346,-736.15 v1(2375.85,-766) ; v1(2480,-290) 2882,-290 v1(2910,-262)
IR: R17.1 U4.24 | length 1292.3
  Top Layer w8: v1(1526.77,-1381) 1526.77,-1208 ; 1526.77,-1290 1526.77,-1208 ; R17.1@1526.77,-1112 1526.77,-1208 ; v1(2415.22,-1370) U4.24@2415.22,-1321.7
  Bottom Layer w8: v1(1526.77,-1381) 2404.22,-1381 v1(2415.22,-1370)
  other v1: 2415.22,-1370
KEY1: P8.4 U4.27 | length 1666.1
  Top Layer w8: v1(2474,-1240) 2474.28,-1240.28 U4.27@2474.28,-1321.7 ; v1(3761,-1153) P8.4@3761,-891.76
  Bottom Layer w8: v1(2474,-1240) 3289,-1240 3376,-1153 3405,-1153 3461,-1153 v1(3761,-1153)
  other v1: 3761,-1153
KEY2: P8.3 U4.4 | length 1580.1
  Top Layer w8: U4.4@2179,-987.06 2253.94,-987.06 v1(2254,-987) ; v1(3661,-987) P8.3@3661,-891.76
  Bottom Layer w8: v1(2254,-987) 3559,-987 ; 3561,-985 3559,-987 ; v1(3661,-987) 3559,-987
  other v1: 3661,-987
KEY3: P8.2 U4.22 | length 1615
  Top Layer w8: U4.22@2375.85,-1321.7 2375.85,-1259.45 v1(2376,-1259.3) ; v1(3561,-1259.3) P8.2@3561,-891.76
  Bottom Layer w8: v1(2376,-1259.3) v1(3561,-1259.3)
  other v1: 3561,-1259.3
KEY4: P8.1 U4.23 | length 1680.4
  Top Layer w8: v1(2395.54,-1430.46) U4.23@2395.54,-1321.7 ; v1(3461,-1375) P8.1@3461,-891.76
  Bottom Layer w8: v1(2395.54,-1430.46) 3405.54,-1430.46 v1(3461,-1375)
LED_CTRL1: U4.3
LED_CTRL2: U4.61
LED_STATUS: U4.2
MISO: P1.8 U4.56 | length 841
  Top Layer w8: U4.56@2434.22,-828.89 U4.56@2434.91,-829.57 2434.91,-776.09 v1(2453,-758) ; v1@3081,-753 P1.8@3081,-648
  Bottom Layer w8: v1(2453,-758) 3048,-758 ; v1@3076,-758 3048,-758 ; v1(3081,-758) 3048,-758
MOSI: P1.4 U4.55 | length 1158
  Top Layer w8: U4.55@2454.59,-829.57 v1@2454.59,-785.41
  Bottom Layer w8: v1(2455,-785) 3397,-785 3481,-701 P1.4@3481,-648
NetC1_2: C1.2 R14.2 U4.5 Y1.2 | length 425.2
  Top Layer w8: C1.2@1916.74,-811 1916.74,-944.06 Y1.2@1917,-944.32 1971.32,-944.32 2014,-987 R14.2@2074.74,-987 ; R14.2@2072,-984.26 R14.2@2074.74,-987 ; U4.5@2179,-1006.74 2136.74,-1006.74 2117,-987 R14.2@2074.74,-987
NetC2_2: C2.2 R14.1 U4.6 Y1.1 | length 417.9
  Top Layer w8: C2.2@1919.74,-1230 1919.74,-1112.42 Y1.1@1917,-1109.68 1965.32,-1109.68 2012,-1063 R14.1@2072,-1063 2101,-1063 2137.58,-1026.43 U4.6@2179,-1026.43